# Altium PCB VisitCardPCB.PcbDoc (part 2 of 3)
Units mm, origin at the board's own origin, x right, y up, seen from the top; angles counter-clockwise.
Board outline 85 x 55 mm, 2 copper layers (Top, Bottom); 50 components, 47 nets, 148 pads, 42 vias.
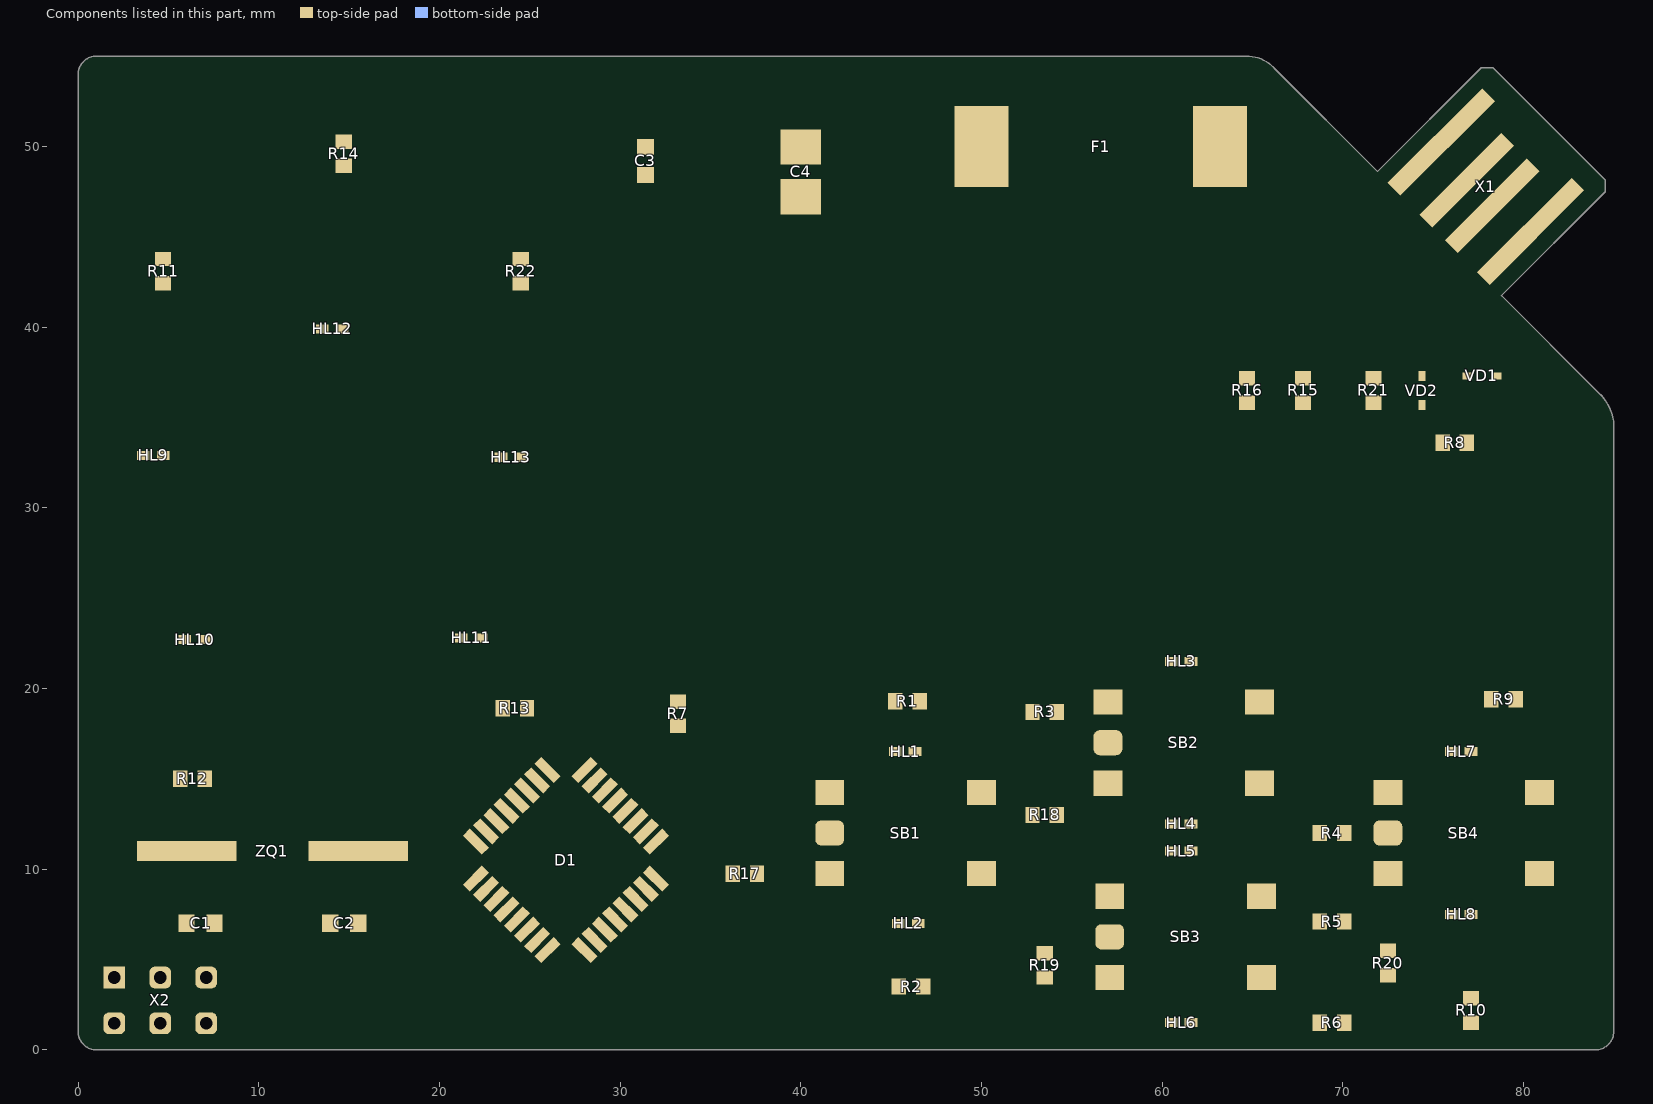
[diagram p2: the components of this part, seen from the top]

## Via types
v1: diameter 1, hole 0.5, Top to Bottom, 41 vias
v2: diameter 3.5/3.5 (per signal layer), hole 2.5, Top to Bottom, 1 vias

## Nets (pads, with @x,y where several pads share a name; then routed paths per layer and width w, separated by ;. In a path a pad name is that pad's centre, name@x,y a point inside that pad or via, vN(x,y) a via of type N, cw(c..) or ccw(c..) an arc to the next point about the centre after c; other vN are vias at no path point) (continued)
copper on no net: (continued)
  Top w0.025: 10.457,27.251 12.514,27.251 ; 10.457,27.276 12.489,27.276 ; 10.457,27.302 12.438,27.302 ; 10.457,27.327 12.413,27.327 ; 10.457,27.353 12.387,27.353 ; 10.457,27.378 12.337,27.378 ; 10.457,27.403 12.311,27.403 ; 10.457,27.429 12.337,27.429 ; 10.457,27.454 12.362,27.454 ; 10.457,27.48 12.413,27.48 ; 10.457,27.505 12.438,27.505 ; 10.457,27.53 12.464,27.53 ; 10.457,27.556 12.489,27.556 ; 10.482,27.175 12.591,27.175 ; 10.482,27.2 12.565,27.2 ; 10.482,27.226 12.54,27.226 ; 10.482,27.581 12.514,27.581 ; 10.482,27.607 12.54,27.607 ; 10.482,27.632 12.565,27.632 ; 10.508,27.124 12.616,27.124 ; 10.508,27.149 12.616,27.149 ; 10.508,27.657 12.591,27.657 ; 10.508,27.683 12.616,27.683 ; 10.533,27.099 12.641,27.099 ; 10.533,27.708 12.641,27.708 ; 10.559,27.073 12.667,27.073 ; 10.559,27.734 12.667,27.734 ; 10.559,27.759 12.667,27.759 ; 10.584,27.048 12.692,27.048 ; 10.609,27.022 12.692,27.022 ; 10.609,27.784 12.692,27.784 ; 10.635,27.81 12.718,27.81 ; 10.66,26.997 12.718,26.997 ; 10.686,27.835 12.718,27.835 ; 10.711,26.972 12.718,26.972 ; 10.762,27.861 12.743,27.861 ; 10.787,26.946 12.743,26.946 ; 10.838,27.886 12.743,27.886 ; 10.863,26.921 12.768,26.921 ; 10.965,27.911 12.768,27.911 ; 10.99,26.895 12.768,26.895 ; 11.092,27.937 12.768,27.937 ; 11.143,26.87 12.768,26.87 ; 11.194,27.962 12.794,27.962 ; 11.219,26.845 12.794,26.845 ; 11.244,27.988 12.794,27.988 ; 11.27,26.819 12.794,26.819 ; 11.295,26.794 12.819,26.794 ; 11.295,28.013 12.819,28.013 ; 11.321,26.743 12.819,26.743 ; 11.321,26.768 12.819,26.768 ; 11.321,28.038 12.819,28.038 ; 11.321,28.064 12.819,28.064 ; 11.346,26.692 12.845,26.692 ; 11.346,26.718 12.845,26.718 ; 11.346,28.089 12.845,28.089 ; 11.346,28.115 12.845,28.115 ; 11.371,26.616 12.87,26.616 ; 11.371,26.641 12.845,26.641 ; 11.371,26.667 12.845,26.667 ; 11.371,28.14 12.845,28.14 ; 11.371,28.165 12.845,28.165 ; 11.371,28.191 12.87,28.191 ; 11.397,26.438 12.895,26.438 ; 11.397,26.464 12.895,26.464 ; 11.397,26.489 12.87,26.489 ; 11.397,26.514 12.87,26.514 ; 11.397,26.54 12.87,26.54 ; 11.397,26.565 12.87,26.565 ; 11.397,26.591 12.87,26.591 ; 11.397,28.216 12.87,28.216 ; 11.397,28.242 12.87,28.242 ; 11.397,28.267 12.87,28.267 ; 11.397,28.292 12.87,28.292 ; 11.397,28.318 12.87,28.318 ; 11.397,28.343 12.895,28.343 ; 11.397,28.369 12.895,28.369 ; 11.422,26.006 12.921,26.006 ; 11.422,26.032 12.921,26.032 ; 11.422,26.057 12.921,26.057 ; 11.422,26.083 12.921,26.083 ; 11.422,26.108 12.921,26.108 ; 11.422,26.133 12.921,26.133 ; 11.422,26.159 12.921,26.159 ; 11.422,26.184 12.921,26.184 ; 11.422,26.21 12.921,26.21 ; 11.422,26.235 12.921,26.235 ; 11.422,26.26 12.921,26.26 ; 11.422,26.286 12.895,26.286 ; 11.422,26.311 12.895,26.311 ; 11.422,26.337 12.895,26.337 ; 11.422,26.362 12.895,26.362 ; 11.422,26.387 12.895,26.387 ; 11.422,26.413 12.895,26.413 ; 11.422,28.394 12.895,28.394 ; 11.422,28.419 12.895,28.419 ; 11.422,28.445 12.895,28.445 ; 11.422,28.47 12.895,28.47 ; 11.422,28.496 12.895,28.496 ; 11.422,28.521 12.895,28.521 ; 11.422,28.546 12.921,28.546 ; 11.422,28.572 12.921,28.572 ; 11.422,28.597 12.921,28.597 ; 11.422,28.623 12.921,28.623 ; 11.422,28.648 12.921,28.648 ; 11.422,28.673 12.921,28.673 ; 11.422,28.699 12.921,28.699 ; 11.422,28.724 12.921,28.724 ; 11.422,28.75 12.921,28.75 ; 11.422,28.775 12.921,28.775 ; 11.422,28.8 12.921,28.8 ; 11.422,28.826 12.921,28.826 ; 11.448,25.549 12.946,25.549 ; 11.448,25.575 12.946,25.575 ; 11.448,25.6 12.946,25.6 ; 11.448,25.625 12.946,25.625 ; 11.448,25.651 12.946,25.651 ; 11.448,25.676 12.946,25.676 ; 11.448,25.702 12.946,25.702 ; 11.448,25.727 12.946,25.727 ; 11.448,25.752 12.946,25.752 ; 11.448,25.778 12.946,25.778 ; 11.448,25.803 12.946,25.803 ; 11.448,25.829 12.946,25.829 ; 11.448,25.854 12.946,25.854 ; 11.448,25.879 12.946,25.879 ; 11.448,25.905 12.946,25.905 ; 11.448,25.93 12.946,25.93 ; 11.448,25.956 12.921,25.956 ; 11.448,25.981 12.921,25.981 ; 11.448,28.851 12.921,28.851 ; 11.448,28.877 12.946,28.877 ; 11.448,28.902 12.946,28.902 ; 11.448,28.927 12.946,28.927 ; 11.448,28.953 12.946,28.953 ; 11.448,28.978 12.946,28.978 ; 11.448,29.004 12.946,29.004 ; 11.448,29.029 12.946,29.029 ; 11.448,29.054 12.946,29.054 ; 11.448,29.08 12.946,29.08 ; 11.448,29.105 12.946,29.105 ; 11.448,29.131 12.946,29.131 ; 11.448,29.156 12.946,29.156 ; 11.448,29.181 12.946,29.181 ; 11.448,29.207 12.946,29.207 ; 11.448,29.232 12.946,29.232 ; 11.448,29.258 12.946,29.258 ; 11.473,25.194 12.972,25.194 ; 11.473,25.219 12.972,25.219 ; 11.473,25.244 12.972,25.244 ; 11.473,25.27 12.972,25.27 ; 11.473,25.295 12.972,25.295 ; 11.473,25.321 12.972,25.321 ; 11.473,25.346 12.972,25.346 ; 11.473,25.371 12.946,25.371 ; 11.473,25.397 12.946,25.397 ; 11.473,25.422 12.946,25.422 ; 11.473,25.448 12.946,25.448 ; 11.473,25.473 12.946,25.473 ; 11.473,25.498 12.946,25.498 ; 11.473,25.524 12.946,25.524 ; 11.473,29.283 12.946,29.283 ; 11.473,29.308 12.946,29.308 ; 11.473,29.334 12.946,29.334 ; 11.473,29.359 12.946,29.359 ; 11.473,29.385 12.946,29.385 ; 11.473,29.41 12.946,29.41 ; 11.473,29.435 12.946,29.435 ; 11.473,29.461 12.972,29.461 ; 11.473,29.486 12.972,29.486 ; 11.473,29.512 12.972,29.512 ; 11.473,29.537 12.972,29.537 ; 11.473,29.562 12.972,29.562 ; 11.473,29.588 12.972,29.588 ; 11.473,29.613 12.972,29.613 ; 11.498,24.889 13.048,24.889 ; 11.498,24.914 13.022,24.914 ; 11.498,24.94 12.997,24.94 ; 11.498,24.965 12.997,24.965 ; 11.498,24.99 12.997,24.99 ; 11.498,25.016 12.972,25.016 ; 11.498,25.041 12.972,25.041 ; 11.498,25.067 12.972,25.067 ; 11.498,25.092 12.972,25.092 ; 11.498,25.117 12.972,25.117 ; 11.498,25.143 12.972,25.143 ; 11.498,25.168 12.972,25.168 ; 11.498,29.639 12.972,29.639 ; 11.498,29.664 12.972,29.664 ; 11.498,29.689 12.972,29.689 ; 11.498,29.715 12.972,29.715 ; 11.498,29.74 12.972,29.74 ; 11.498,29.766 12.972,29.766 ; 11.498,29.791 12.972,29.791 ; 11.498,29.816 12.972,29.816 ; 11.498,29.842 12.997,29.842 ; 11.498,29.867 12.997,29.867 ; 11.498,29.893 13.022,29.893 ; 11.498,29.918 13.022,29.918 ; 11.524,24.736 13.632,24.736 ; 11.524,24.762 13.581,24.762 ; 11.524,24.787 13.175,24.787 ; 11.524,24.813 13.149,24.813 ; 11.524,24.838 13.099,24.838 ; 11.524,24.863 13.073,24.863 ; 11.524,29.943 13.048,29.943 ; 11.524,29.969 13.099,29.969 ; 11.524,29.994 13.124,29.994 ; 11.524,30.02 13.175,30.02 ; 11.524,30.045 13.226,30.045 ; 11.524,30.07 13.632,30.07 ; 11.549,24.66 13.708,24.66 ; 11.549,24.686 13.708,24.686 ; 11.549,24.711 13.683,24.711 ; 11.549,30.096 13.657,30.096 ; 11.549,30.121 13.683,30.121 ; 11.549,30.147 13.708,30.147 ; 11.549,30.172 13.734,30.172 ; 11.575,24.584 13.759,24.584 ; 11.575,24.609 13.759,24.609 ; 11.575,24.635 13.734,24.635 ; 11.575,30.197 13.759,30.197 ; 11.575,30.223 13.759,30.223 ; 11.575,30.248 13.759,30.248 ; 11.6,24.533 13.784,24.533 ; 11.6,24.559 13.784,24.559 ; 11.6,30.274 13.784,30.274 ; 11.6,30.299 13.784,30.299 ; 11.625,24.482 13.784,24.482 ; 11.625,24.508 13.784,24.508 ; 11.625,30.324 13.784,30.324 ; 11.625,30.35 13.784,30.35 ; 11.651,24.432 13.784,24.432 ; 11.651,24.457 13.784,24.457 ; 11.651,30.375 13.784,30.375 ; 11.676,24.381 13.784,24.381 ; 11.676,24.406 13.784,24.406 ; 11.676,30.401 13.784,30.401 ; 11.676,30.426 13.784,30.426 ; 11.702,24.355 13.784,24.355 ; 11.702,30.451 13.784,30.451 ; 11.702,30.477 13.784,30.477 ; 11.727,24.33 13.784,24.33 ; 11.727,30.502 13.784,30.502 ; 11.752,24.279 13.784,24.279 ; 11.752,24.305 13.784,24.305 ; 11.752,30.528 13.784,30.528 ; 11.778,24.254 13.759,24.254 ; 11.778,30.553 13.759,30.553 ; 11.803,24.228 13.759,24.228 ; 11.803,30.578 13.759,30.578 ; 11.829,24.203 13.734,24.203 ; 11.829,30.604 13.759,30.604 ; 11.854,24.178 13.734,24.178 ; 11.854,30.629 13.734,30.629 ; 11.879,24.152 13.708,24.152 ; 11.879,30.655 13.734,30.655 ; 11.905,30.68 13.708,30.68 ; 11.93,24.127 13.708,24.127 ; 11.956,24.101 13.683,24.101 ; 11.956,30.705 13.683,30.705 ; 11.981,24.076 13.657,24.076 ; 11.981,30.731 13.657,30.731 ; 12.006,30.756 13.657,30.756 ; 12.032,24.051 13.632,24.051 ; 12.057,24.025 13.607,24.025 ; 12.057,30.782 13.632,30.782 ; 12.083,30.807 13.581,30.807 ; 12.108,24 13.581,24 ; 12.133,23.974 13.556,23.974 ; 12.133,30.832 13.556,30.832 ; 12.159,30.858 13.53,30.858 ; 12.184,23.949 13.505,23.949 ; 12.21,30.883 13.48,30.883 ; 12.235,23.924 13.48,23.924 ; 12.26,23.898 13.429,23.898 ; 12.26,30.909 13.454,30.909 ; 12.311,30.934 13.378,30.934 ; 12.337,23.873 13.378,23.873 ; 12.362,30.959 13.327,30.959 ; 12.387,23.847 13.302,23.847 ; 12.438,30.985 13.251,30.985 ; 12.489,23.822 13.2,23.822 ; 12.565,31.01 13.124,31.01 ; 12.641,23.797 13.073,23.797 ; 13.276,30.045 13.581,30.045 ; 14.369,24.279 16.401,24.279 ; 14.369,24.305 16.401,24.305 ; 14.369,24.33 16.426,24.33 ; 14.369,24.355 16.451,24.355 ; 14.369,24.381 16.477,24.381 ; 14.369,24.406 16.477,24.406 ; 14.369,24.432 16.502,24.432 ; 14.369,24.457 16.528,24.457 ; 14.369,24.482 16.528,24.482 ; 14.369,24.508 16.553,24.508 ; 14.369,24.533 16.553,24.533 ; 14.369,24.559 16.553,24.559 ; 14.369,30.274 16.553,30.274 ; 14.369,30.299 16.553,30.299 ; 14.369,30.324 16.528,30.324 ; 14.369,30.35 16.528,30.35 ; 14.369,30.375 16.502,30.375 ; 14.369,30.401 16.502,30.401 ; 14.369,30.426 16.477,30.426 ; 14.369,30.451 16.451,30.451 ; 14.369,30.477 16.451,30.477 ; 14.369,30.502 16.426,30.502 ; 14.369,30.528 16.401,30.528 ; 14.394,24.228 16.35,24.228 ; 14.394,24.254 16.375,24.254 ; 14.394,24.584 16.578,24.584 ; 14.394,24.609 16.578,24.609 ; 14.394,30.197 16.578,30.197 ; 14.394,30.223 16.578,30.223 ; 14.394,30.248 16.578,30.248 ; 14.394,30.553 16.375,30.553 ; 14.394,30.578 16.35,30.578 ; 14.394,30.604 16.324,30.604 ; 14.419,24.178 16.299,24.178 ; 14.419,24.203 16.324,24.203 ; 14.419,24.635 16.578,24.635 ; 14.419,30.172 16.604,30.172 ; 14.419,30.629 16.299,30.629 ; 14.445,24.127 16.223,24.127 ; 14.445,24.152 16.274,24.152 ; 14.445,24.66 16.604,24.66 ; 14.445,24.686 16.604,24.686 ; 14.445,30.147 16.604,30.147 ; 14.445,30.655 16.274,30.655 ; 14.445,30.68 16.248,30.68 ; 14.47,24.101 16.197,24.101 ; 14.47,24.711 16.604,24.711 ; 14.47,30.121 16.604,30.121 ; 14.47,30.705 16.197,30.705 ; 14.496,24.076 16.172,24.076 ; 14.496,30.096 16.604,30.096 ; 14.496,30.731 16.172,30.731 ; 14.496,30.756 16.147,30.756 ; 14.521,24.051 16.121,24.051 ; 14.521,24.736 16.629,24.736 ; 14.521,30.07 16.629,30.07 ; 14.521,30.782 16.096,30.782 ; 14.546,24.025 16.096,24.025 ; 14.572,24 16.045,24 ; 14.572,24.762 16.629,24.762 ; 14.572,30.807 16.07,30.807 ; 14.597,23.974 16.02,23.974 ; 14.597,30.045 14.877,30.045 ; 14.597,30.832 16.02,30.832 ; 14.623,30.858 15.994,30.858 ; 14.648,23.949 15.969,23.949 ; 14.673,23.924 15.918,23.924 ; 14.673,30.883 15.943,30.883 ; 14.699,30.909 15.893,30.909 ; 14.724,23.898 15.893,23.898 ; 14.775,23.873 15.816,23.873 ; 14.775,30.934 15.842,30.934 ; 14.826,30.959 15.791,30.959 ; 14.851,23.847 15.766,23.847 ; 14.902,30.985 15.715,30.985 ; 14.927,30.045 16.629,30.045 ; 14.953,23.822 15.664,23.822 ; 14.978,24.787 16.629,24.787 ; 14.978,30.02 16.629,30.02 ; 15.004,24.813 16.629,24.813 ; 15.029,29.994 16.629,29.994 ; 15.029,31.01 15.588,31.01 ; 15.054,24.838 16.629,24.838 ; 15.054,29.969 16.629,29.969 ; 15.08,23.797 15.512,23.797 ; 15.08,24.863 16.629,24.863 ; 15.105,24.889 16.655,24.889 ; 15.105,29.943 16.629,29.943 ; 15.131,24.914 16.655,24.914 ; 15.131,29.893 16.655,29.893 ; 15.131,29.918 16.655,29.918 ; 15.156,24.94 16.655,24.94 ; 15.156,24.965 16.655,24.965 ; 15.156,29.842 16.655,29.842 ; 15.156,29.867 16.655,29.867 ; 15.181,24.99 16.655,24.99 ; 15.181,25.016 16.655,25.016 ; 15.181,25.041 16.655,25.041 ; 15.181,25.067 16.655,25.067 ; 15.181,25.092 16.655,25.092 ; 15.181,25.117 16.655,25.117 ; 15.181,25.143 16.655,25.143 ; 15.181,25.168 16.655,25.168 ; 15.181,25.194 16.68,25.194 ; 15.181,25.219 16.68,25.219 ; 15.181,25.244 16.68,25.244 ; 15.181,25.27 16.68,25.27 ; 15.181,25.295 16.68,25.295 ; 15.181,25.321 16.68,25.321 ; 15.181,29.486 16.68,29.486 ; 15.181,29.512 16.68,29.512 ; 15.181,29.537 16.68,29.537 ; 15.181,29.562 16.68,29.562 ; 15.181,29.588 16.68,29.588 ; 15.181,29.613 16.68,29.613 ; 15.181,29.639 16.68,29.639 ; 15.181,29.664 16.655,29.664 ; 15.181,29.689 16.655,29.689 ; 15.181,29.715 16.655,29.715 ; 15.181,29.74 16.655,29.74 ; 15.181,29.766 16.655,29.766 ; 15.181,29.791 16.655,29.791 ; 15.181,29.816 16.655,29.816 ; 15.207,25.346 16.68,25.346 ; 15.207,25.371 16.68,25.371 ; 15.207,25.397 16.68,25.397 ; 15.207,25.422 16.68,25.422 ; 15.207,25.448 16.68,25.448 ; 15.207,25.473 16.68,25.473 ; 15.207,25.498 16.68,25.498 ; 15.207,25.524 16.68,25.524 ; 15.207,25.549 16.705,25.549 ; 15.207,25.575 16.705,25.575 ; 15.207,25.6 16.705,25.6 ; 15.207,25.625 16.705,25.625 ; 15.207,25.651 16.705,25.651 ; 15.207,25.676 16.705,25.676 ; 15.207,25.702 16.705,25.702 ; 15.207,25.727 16.705,25.727 ; 15.207,25.752 16.705,25.752 ; 15.207,25.778 16.705,25.778 ; 15.207,25.803 16.705,25.803 ; 15.207,25.829 16.705,25.829 ; 15.207,25.854 16.705,25.854 ; 15.207,25.879 16.705,25.879 ; 15.207,25.905 16.705,25.905 ; 15.207,28.902 16.705,28.902 ; 15.207,28.927 16.705,28.927 ; 15.207,28.953 16.705,28.953 ; 15.207,28.978 16.705,28.978 ; 15.207,29.004 16.705,29.004 ; 15.207,29.029 16.705,29.029 ; 15.207,29.054 16.705,29.054 ; 15.207,29.08 16.705,29.08 ; 15.207,29.105 16.705,29.105 ; 15.207,29.131 16.705,29.131 ; 15.207,29.156 16.705,29.156 ; 15.207,29.181 16.705,29.181 ; 15.207,29.207 16.705,29.207 ; 15.207,29.232 16.705,29.232 ; 15.207,29.258 16.705,29.258 ; 15.207,29.283 16.705,29.283 ; 15.207,29.308 16.68,29.308 ; 15.207,29.334 16.68,29.334 ; 15.207,29.359 16.68,29.359 ; 15.207,29.385 16.68,29.385 ; 15.207,29.41 16.68,29.41 ; 15.207,29.435 16.68,29.435 ; 15.207,29.461 16.68,29.461 ; 15.232,25.93 16.705,25.93 ; 15.232,25.956 16.705,25.956 ; 15.232,25.981 16.731,25.981 ; 15.232,26.006 16.731,26.006 ; 15.232,26.032 16.731,26.032 ; 15.232,26.057 16.731,26.057 ; 15.232,26.083 16.731,26.083 ; 15.232,26.108 16.731,26.108 ; 15.232,26.133 16.731,26.133 ; 15.232,26.159 16.731,26.159 ; 15.232,26.184 16.731,26.184 ; 15.232,26.21 16.731,26.21 ; 15.232,26.235 16.731,26.235 ; 15.232,26.26 16.731,26.26 ; 15.232,28.546 16.731,28.546 ; 15.232,28.572 16.731,28.572 ; 15.232,28.597 16.731,28.597 ; 15.232,28.623 16.731,28.623 ; 15.232,28.648 16.731,28.648 ; 15.232,28.673 16.731,28.673 ; 15.232,28.699 16.731,28.699 ; 15.232,28.724 16.731,28.724 ; 15.232,28.75 16.731,28.75 ; 15.232,28.775 16.731,28.775 ; 15.232,28.8 16.731,28.8 ; 15.232,28.826 16.731,28.826 ; 15.232,28.851 16.705,28.851 ; 15.232,28.877 16.705,28.877 ; 15.258,26.286 16.731,26.286 ; 15.258,26.311 16.731,26.311 ; 15.258,26.337 16.731,26.337 ; 15.258,26.362 16.731,26.362 ; 15.258,26.387 16.731,26.387 ; 15.258,26.413 16.756,26.413 ; 15.258,26.438 16.756,26.438 ; 15.258,26.464 16.756,26.464 ; 15.258,28.343 16.756,28.343 ; 15.258,28.369 16.756,28.369 ; 15.258,28.394 16.756,28.394 ; 15.258,28.419 16.731,28.419 ; 15.258,28.445 16.731,28.445 ; 15.258,28.47 16.731,28.47 ; 15.258,28.496 16.731,28.496 ; 15.258,28.521 16.731,28.521 ; 15.283,26.489 16.756,26.489 ; 15.283,26.514 16.756,26.514 ; 15.283,26.54 16.756,26.54 ; 15.283,26.565 16.756,26.565 ; 15.283,26.591 16.756,26.591 ; 15.283,26.616 16.782,26.616 ; 15.283,28.191 16.782,28.191 ; 15.283,28.216 16.782,28.216 ; 15.283,28.242 16.756,28.242 ; 15.283,28.267 16.756,28.267 ; 15.283,28.292 16.756,28.292 ; 15.283,28.318 16.756,28.318 ; 15.308,26.641 16.782,26.641 ; 15.308,26.667 16.782,26.667 ; 15.308,26.692 16.807,26.692 ; 15.308,26.718 16.807,26.718 ; 15.308,28.089 16.807,28.089 ; 15.308,28.115 16.807,28.115 ; 15.308,28.14 16.782,28.14 ; 15.308,28.165 16.782,28.165 ; 15.334,26.743 16.832,26.743 ; 15.334,26.768 16.832,26.768 ; 15.334,26.794 16.858,26.794 ; 15.334,28.013 16.858,28.013 ; 15.334,28.038 16.832,28.038 ; 15.334,28.064 16.832,28.064 ; 15.359,26.819 16.883,26.819 ; 15.359,26.845 16.934,26.845 ; 15.359,27.962 16.959,27.962 ; 15.359,27.988 16.909,27.988 ; 15.385,26.87 17.01,26.87 ; 15.385,26.895 17.163,26.895 ; 15.385,27.911 17.188,27.911 ; 15.385,27.937 17.061,27.937 ; 15.41,26.921 17.29,26.921 ; 15.41,26.946 17.366,26.946 ; 15.41,27.861 17.391,27.861 ; 15.41,27.886 17.315,27.886 ; 15.435,26.972 17.442,26.972 ; 15.435,26.997 17.493,26.997 ; 15.435,27.81 17.518,27.81 ; 15.435,27.835 17.467,27.835 ; 15.461,27.022 17.544,27.022 ; 15.461,27.048 17.569,27.048 ; 15.461,27.784 17.544,27.784 ; 15.486,27.073 17.594,27.073 ; 15.486,27.734 17.62,27.734 ; 15.486,27.759 17.594,27.759 ; 15.512,27.099 17.62,27.099 ; 15.512,27.708 17.62,27.708 ; 15.537,27.124 17.645,27.124 ; 15.537,27.149 17.645,27.149 ; 15.537,27.683 17.645,27.683 ; 15.562,27.175 17.671,27.175 ; 15.562,27.657 17.671,27.657 ; 15.588,27.2 17.671,27.2 ; 15.588,27.632 17.671,27.632 ; 15.613,27.226 17.671,27.226 ; 15.613,27.607 17.671,27.607 ; 15.639,27.251 17.696,27.251 ; 15.639,27.581 17.696,27.581 ; 15.664,27.276 17.696,27.276 ; 15.664,27.556 17.696,27.556 ; 15.689,27.53 17.696,27.53 ; 15.715,27.302 17.696,27.302 ; 15.715,27.505 17.696,27.505 ; 15.74,27.327 17.696,27.327 ; 15.74,27.48 17.696,27.48 ; 15.766,27.353 17.696,27.353 ; 15.791,27.454 17.696,27.454 ; 15.816,27.378 17.696,27.378 ; 15.816,27.429 17.696,27.429 ; 15.842,27.403 17.696,27.403 ; 57.329,28.274 63.883,28.274 ; 57.329,28.299 63.832,28.299 ; 57.329,28.325 63.781,28.325 ; 57.329,28.35 63.73,28.35 ; 57.329,28.376 63.679,28.376 ; 57.329,28.401 63.629,28.401 ; 57.329,28.426 63.552,28.426 ; 57.329,28.452 63.476,28.452 ; 57.329,28.477 63.4,28.477 ; 57.329,28.503 63.273,28.503 ; 57.329,28.528 59.158,28.528 ; 57.329,28.553 59.158,28.553 ; 57.329,28.579 59.158,28.579 ; 57.329,28.604 59.158,28.604 ; 57.329,28.63 59.158,28.63 ; 57.329,28.655 59.158,28.655 ; 57.329,28.68 59.158,28.68 ; 57.329,28.706 59.158,28.706 ; 57.329,28.731 59.158,28.731 ; 57.329,28.757 59.158,28.757 ; 57.329,28.782 59.158,28.782 ; 57.329,28.807 59.158,28.807 ; 57.329,28.833 59.158,28.833 ; 57.329,28.858 59.158,28.858 ; 57.329,28.884 59.158,28.884 ; 57.329,28.909 59.158,28.909 ; 57.329,28.934 59.158,28.934 ; 57.329,28.96 59.158,28.96 ; 57.329,28.985 59.158,28.985 ; 57.329,29.011 59.158,29.011 ; 57.329,29.036 59.158,29.036 ; 57.329,29.061 59.158,29.061 ; 57.329,29.087 59.158,29.087 ; 57.329,29.112 59.158,29.112 ; 57.329,29.138 59.158,29.138 ; 57.329,29.163 59.158,29.163 ; 57.329,29.188 59.158,29.188 ; 57.329,29.214 59.158,29.214 ; 57.329,29.239 59.158,29.239 ; 57.329,29.265 59.158,29.265 ; 57.329,29.29 59.158,29.29 ; 57.329,29.315 59.158,29.315 ; 57.329,29.341 59.158,29.341 ; 57.329,29.366 59.158,29.366 ; 57.329,29.392 59.158,29.392 ; 57.329,29.417 59.158,29.417 ; 57.329,29.442 59.158,29.442 ; 57.329,29.468 59.158,29.468 ; 57.329,29.493 59.158,29.493 ; 57.329,29.519 59.158,29.519 ; 57.329,29.544 59.158,29.544 ; 57.329,29.569 59.158,29.569 ; 57.329,29.595 59.158,29.595 ; 57.329,29.62 59.158,29.62 ; 57.329,29.646 59.158,29.646 ; 57.329,29.671 59.158,29.671 ; 57.329,29.696 59.158,29.696 ; 57.329,29.722 59.158,29.722 ; 57.329,29.747 59.158,29.747 ; 57.329,29.773 59.158,29.773 ; 57.329,29.798 59.158,29.798 ; 57.329,29.823 59.158,29.823 ; 57.329,29.849 59.158,29.849 ; 57.329,29.874 59.158,29.874 ; 57.329,29.9 59.158,29.9 ; 57.329,29.925 59.158,29.925 ; 57.329,29.95 59.158,29.95 ; 57.329,29.976 59.158,29.976 ; 57.329,30.001 59.158,30.001 ; 57.329,30.027 59.158,30.027 ; 57.329,30.052 59.158,30.052 ; 57.329,30.077 59.158,30.077 ; 57.329,30.103 59.158,30.103 ; 57.329,30.128 59.158,30.128 ; 57.329,30.154 59.158,30.154 ; 57.329,30.179 59.158,30.179 ; 57.329,30.204 59.158,30.204 ; 57.329,30.23 59.158,30.23 ; 57.329,30.255 64.035,30.255 ; 57.329,30.281 64.086,30.281 ; 57.329,30.306 64.137,30.306 ; 57.329,30.331 64.162,30.331 ; 57.329,30.357 64.187,30.357 ; 57.329,30.382 64.213,30.382 ; 57.329,30.408 64.238,30.408 ; 57.329,30.433 64.238,30.433 ; 57.329,30.458 64.264,30.458 ; 57.329,30.484 64.264,30.484 ; 57.355,28.045 64.162,28.045 ; 57.355,28.071 64.137,28.071 ; 57.355,28.096 64.111,28.096 ; 57.355,28.122 64.086,28.122 ; 57.355,28.147 64.06,28.147 ; 57.355,28.172 64.01,28.172 ; 57.355,28.198 63.984,28.198 ; 57.355,28.223 63.959,28.223 ; 57.355,28.249 63.908,28.249 ; 57.355,30.509 64.264,30.509 ; 57.355,30.535 64.289,30.535 ; 57.355,30.56 64.289,30.56 ; 57.355,30.585 64.289,30.585 ; 57.355,30.611 64.289,30.611 ; 57.355,30.636 64.289,30.636 ; 57.355,30.662 64.289,30.662 ; 57.355,30.687 64.289,30.687 ; 57.355,30.712 64.289,30.712 ; 57.38,27.944 64.264,27.944 ; 57.38,27.969 64.238,27.969 ; 57.38,27.995 64.213,27.995 ; 57.38,28.02 64.187,28.02 ; 57.38,30.738 64.289,30.738 ; 57.38,30.763 64.289,30.763 ; 57.38,30.789 64.289,30.789 ; 57.38,30.814 64.289,30.814 ; 57.406,27.868 64.314,27.868 ; 57.406,27.893 64.289,27.893 ; 57.406,27.918 64.289,27.918 ; 57.406,30.839 64.289,30.839 ; 57.406,30.865 64.289,30.865 ; 57.406,30.89 64.289,30.89 ; 57.431,27.791 64.365,27.791 ; 57.431,27.817 64.365,27.817 ; 57.431,27.842 64.34,27.842 ; 57.431,30.916 64.289,30.916 ; 57.431,30.941 64.289,30.941 ; 57.431,30.966 64.289,30.966 ; 57.456,27.715 64.416,27.715 ; 57.456,27.741 64.416,27.741 ; 57.456,27.766 64.391,27.766 ; 57.456,30.992 64.289,30.992 ; 57.456,31.017 64.289,31.017 ; 57.456,31.043 64.289,31.043 ; 57.482,27.664 64.441,27.664 ; 57.482,27.69 64.441,27.69 ; 57.482,31.068 64.289,31.068 ; 57.482,31.093 64.289,31.093 ; 57.507,27.614 64.467,27.614 ; 57.507,27.639 64.467,27.639 ; 57.507,31.119 64.289,31.119 ; 57.507,31.144 64.289,31.144 ; 57.533,27.563 64.492,27.563 ; 57.533,27.588 64.492,27.588 ; 57.533,31.17 64.289,31.17 ; 57.533,31.195 64.289,31.195 ; 57.558,27.512 64.518,27.512 ; 57.558,27.537 64.518,27.537 ; 57.558,31.22 64.289,31.22 ; 57.558,31.246 64.289,31.246 ; 57.583,27.487 64.543,27.487 ; 57.583,31.271 64.289,31.271 ; 57.609,27.436 64.543,27.436 ; 57.609,27.461 64.543,27.461 ; 57.609,31.297 64.289,31.297 ; 57.609,31.322 64.289,31.322 ; 57.634,27.41 64.568,27.41 ; 57.634,31.347 64.289,31.347 ; 57.66,27.36 64.568,27.36 ; 57.66,27.385 64.568,27.385 ; 57.66,31.373 64.289,31.373 ; 57.66,31.398 64.289,31.398 ; 57.685,27.334 64.594,27.334 ; 57.685,31.424 64.289,31.424 ; 57.71,27.309 64.594,27.309 ; 57.71,31.449 64.289,31.449 ; 57.736,27.283 64.594,27.283 ; 57.736,31.474 64.289,31.474 ; 57.761,27.258 64.619,27.258 ; 57.761,31.5 64.289,31.5 ; 57.787,27.207 64.619,27.207 ; 57.787,27.233 64.619,27.233 ; 57.787,31.525 64.289,31.525 ; 57.787,31.551 64.289,31.551 ; 57.812,27.182 64.619,27.182 ; 57.812,31.576 64.289,31.576 ; 57.837,27.156 64.619,27.156 ; 57.837,31.601 64.289,31.601 ; 57.863,23.296 63.908,23.296 ; 57.863,23.321 63.959,23.321 ; 57.863,23.346 63.984,23.346 ; 57.863,23.372 64.01,23.372 ; 57.863,23.397 64.06,23.397 ; 57.863,23.423 64.086,23.423 ; 57.863,23.448 64.111,23.448 ; 57.863,23.473 64.137,23.473 ; 57.863,23.499 64.162,23.499 ; 57.863,23.524 64.187,23.524 ; 57.863,23.55 64.213,23.55 ; 57.863,23.575 64.238,23.575 ; 57.863,23.6 64.264,23.6 ; 57.863,23.626 64.289,23.626 ; 57.863,23.651 64.289,23.651 ; 57.863,23.677 64.314,23.677 ; 57.863,23.702 64.34,23.702 ; 57.863,23.727 64.365,23.727 ; 57.863,23.753 64.365,23.753 ; 57.863,23.778 64.391,23.778 ; 57.863,23.804 64.416,23.804 ; 57.863,23.829 64.416,23.829 ; 57.863,23.854 64.441,23.854 ; 57.863,23.88 64.441,23.88 ; 57.863,23.905 64.467,23.905 ; 57.863,23.931 64.467,23.931 ; 57.863,23.956 64.492,23.956 ; 57.863,23.981 64.492,23.981 ; 57.863,24.007 64.518,24.007 ; 57.863,24.032 64.518,24.032 ; 57.863,24.058 64.543,24.058 ; 57.863,24.083 64.543,24.083 ; 57.863,24.108 64.543,24.108 ; 57.863,24.134 64.568,24.134 ; 57.863,24.159 64.568,24.159 ; 57.863,24.185 64.568,24.185 ; 57.863,24.21 64.594,24.21 ; 57.863,24.235 64.594,24.235 ; 57.863,24.261 64.594,24.261 ; 57.863,24.286 64.619,24.286 ; 57.863,24.312 64.619,24.312 ; 57.863,24.337 64.619,24.337 ; 57.863,24.362 64.619,24.362 ; 57.863,24.388 64.619,24.388 ; 57.863,24.413 64.645,24.413 ; 57.863,24.439 64.645,24.439 ; 57.863,24.464 64.645,24.464 ; 57.863,24.489 64.645,24.489 ; 57.863,24.515 64.645,24.515 ; 57.863,24.54 64.645,24.54 ; 57.863,24.566 64.645,24.566 ; 57.863,24.591 64.645,24.591 ; 57.888,23.219 63.781,23.219 ; 57.888,23.245 63.832,23.245 ; 57.888,23.27 63.883,23.27 ; 57.888,24.616 64.645,24.616 ; 57.888,24.642 64.645,24.642 ; 57.888,27.131 64.645,27.131 ; 57.888,31.627 64.289,31.627 ; 57.914,23.194 63.73,23.194 ; 57.914,24.667 64.645,24.667 ; 57.914,24.693 64.645,24.693 ; 57.914,27.106 64.645,27.106 ; 57.914,31.652 64.289,31.652 ; 57.939,23.143 63.629,23.143 ; 57.939,23.169 63.679,23.169 ; 57.939,24.718 64.645,24.718 ; 57.939,27.08 64.645,27.08 ; 57.939,31.678 64.289,31.678 ; 57.964,23.118 63.552,23.118 ; 57.964,24.743 64.645,24.743 ; 57.964,27.055 64.645,27.055 ; 57.964,31.703 64.289,31.703 ; 57.99,24.769 64.645,24.769 ; 57.99,27.029 64.645,27.029 ; 57.99,31.728 64.289,31.728 ; 58.015,23.092 63.476,23.092 ; 58.041,23.067 63.4,23.067 ; 58.041,24.794 64.645,24.794 ; 58.041,27.004 64.645,27.004 ; 58.041,31.754 64.289,31.754 ; 58.066,26.979 64.645,26.979 ; 58.066,31.779 64.289,31.779 ; 58.091,23.042 63.273,23.042 ; 58.091,24.82 64.645,24.82 ; 58.117,26.953 64.645,26.953 ; 58.117,31.805 64.264,31.805 ; 58.142,26.928 64.645,26.928 ; 58.142,31.83 64.264,31.83 ; 58.193,24.845 64.645,24.845 ; 58.193,26.902 64.645,26.902 ; 58.193,31.855 64.264,31.855 ; 58.244,26.877 64.645,26.877 ; 58.244,31.881 64.238,31.881 ; 58.295,26.852 64.645,26.852 ; 58.295,31.906 64.213,31.906 ; 58.345,26.826 64.645,26.826 ; 58.345,31.932 64.213,31.932 ; 58.422,26.801 64.645,26.801 ; 58.422,31.957 64.187,31.957 ; 58.472,26.775 64.645,26.775 ; 58.472,31.982 64.162,31.982 ; 58.574,26.75 64.645,26.75 ; 58.574,32.008 64.111,32.008 ; 58.676,26.725 64.645,26.725 ; 58.676,32.033 64.06,32.033 ; 58.879,26.699 64.645,26.699 ; 58.879,32.059 63.959,32.059 ; 62.816,24.87 64.645,24.87 ; 62.816,24.896 64.645,24.896 ; 62.816,24.921 64.645,24.921 ; 62.816,24.947 64.645,24.947 ; 62.816,24.972 64.645,24.972 ; 62.816,24.997 64.645,24.997 ; 62.816,25.023 64.645,25.023 ; 62.816,25.048 64.645,25.048 ; 62.816,25.074 64.645,25.074 ; 62.816,25.099 64.645,25.099 ; 62.816,25.124 64.645,25.124 ; 62.816,25.15 64.645,25.15 ; 62.816,25.175 64.645,25.175 ; 62.816,25.201 64.645,25.201 ; 62.816,25.226 64.645,25.226 ; 62.816,25.251 64.645,25.251 ; 62.816,25.277 64.645,25.277 ; 62.816,25.302 64.645,25.302 ; 62.816,25.328 64.645,25.328 ; 62.816,25.353 64.645,25.353 ; 62.816,25.378 64.645,25.378 ; 62.816,25.404 64.645,25.404 ; 62.816,25.429 64.645,25.429 ; 62.816,25.455 64.645,25.455 ; 62.816,25.48 64.645,25.48 ; 62.816,25.505 64.645,25.505 ; 62.816,25.531 64.645,25.531 ; 62.816,25.556 64.645,25.556 ; 62.816,25.582 64.645,25.582 ; 62.816,25.607 64.645,25.607 ; 62.816,25.632 64.645,25.632 ; 62.816,25.658 64.645,25.658 ; 62.816,25.683 64.645,25.683 ; 62.816,25.709 64.645,25.709 ; 62.816,25.734 64.645,25.734 ; 62.816,25.759 64.645,25.759 ; 62.816,25.785 64.645,25.785 ; 62.816,25.81 64.645,25.81 ; 62.816,25.836 64.645,25.836 ; 62.816,25.861 64.645,25.861 ; 62.816,25.886 64.645,25.886 ; 62.816,25.912 64.645,25.912 ; 62.816,25.937 64.645,25.937 ; 62.816,25.963 64.645,25.963 ; 62.816,25.988 64.645,25.988 ; 62.816,26.013 64.645,26.013 ; 62.816,26.039 64.645,26.039 ; 62.816,26.064 64.645,26.064 ; 62.816,26.09 64.645,26.09 ; 62.816,26.115 64.645,26.115 ; 62.816,26.14 64.645,26.14 ; 62.816,26.166 64.645,26.166 ; 62.816,26.191 64.645,26.191 ; 62.816,26.217 64.645,26.217 ; 62.816,26.242 64.645,26.242 ; 62.816,26.267 64.645,26.267 ; 62.816,26.293 64.645,26.293 ; 62.816,26.318 64.645,26.318 ; 62.816,26.344 64.645,26.344 ; 62.816,26.369 64.645,26.369 ; 62.816,26.394 64.645,26.394 ; 62.816,26.42 64.645,26.42 ; 62.816,26.445 64.645,26.445 ; 62.816,26.471 64.645,26.471 ; 62.816,26.496 64.645,26.496 ; 62.816,26.521 64.645,26.521 ; 62.816,26.547 64.645,26.547 ; 62.816,26.572 64.645,26.572 ; 62.816,26.598 64.645,26.598 ; 62.816,26.623 64.645,26.623 ; 62.816,26.648 64.645,26.648 ; 62.816,26.674 64.645,26.674 ; 66.143,24.439 72.849,24.439 ; 66.143,24.464 72.849,24.464 ; 66.143,24.489 72.849,24.489 ; 66.143,24.515 72.849,24.515 ; 66.143,24.54 72.849,24.54 ; 66.143,24.566 72.849,24.566 ; 66.143,24.591 72.849,24.591 ; 66.143,24.616 72.849,24.616 ; 66.143,24.642 72.849,24.642 ; 66.143,24.667 72.849,24.667 ; 66.143,24.693 72.849,24.693 ; 66.143,24.718 72.849,24.718 ; 66.143,24.743 72.849,24.743 ; 66.143,24.769 72.849,24.769 ; 66.143,24.794 72.849,24.794 ; 66.143,24.82 72.849,24.82 ; 66.143,24.845 72.849,24.845 ; 66.143,24.87 67.972,24.87 ; 66.143,24.896 67.972,24.896 ; 66.143,24.921 67.972,24.921 ; 66.143,24.947 67.972,24.947 ; 66.143,24.972 67.972,24.972 ; 66.143,24.997 67.972,24.997 ; 66.143,25.023 67.972,25.023 ; 66.143,25.048 67.972,25.048 ; 66.143,25.074 67.972,25.074 ; 66.143,25.099 67.972,25.099 ; 66.143,25.124 67.972,25.124 ; 66.143,25.15 67.972,25.15 ; 66.143,25.175 67.972,25.175 ; 66.143,25.201 67.972,25.201 ; 66.143,25.226 67.972,25.226 ; 66.143,25.251 67.972,25.251 ; 66.143,25.277 67.972,25.277 ; 66.143,25.302 67.972,25.302 ; 66.143,25.328 67.972,25.328 ; 66.143,25.353 67.972,25.353 ; 66.143,25.378 67.972,25.378 ; 66.143,25.404 67.972,25.404 ; 66.143,25.429 67.972,25.429 ; 66.143,25.455 67.972,25.455 ; 66.143,25.48 67.972,25.48 ; 66.143,25.505 67.972,25.505 ; 66.143,25.531 67.972,25.531 ; 66.143,25.556 67.972,25.556 ; 66.143,25.582 67.972,25.582 ; 66.143,25.607 67.972,25.607 ; 66.143,25.632 67.972,25.632 ; 66.143,25.658 67.972,25.658 ; 66.143,25.683 67.972,25.683 ; 66.143,25.709 67.972,25.709 ; 66.143,25.734 67.972,25.734 ; 66.143,25.759 67.972,25.759 ; 66.143,25.785 67.972,25.785 ; 66.143,25.81 67.972,25.81 ; 66.143,25.836 67.972,25.836 ; 66.143,25.861 67.972,25.861 ; 66.143,25.886 67.972,25.886 ; 66.143,25.912 67.972,25.912 ; 66.143,25.937 67.972,25.937 ; 66.143,25.963 67.972,25.963 ; 66.143,25.988 67.972,25.988 ; 66.143,26.013 67.972,26.013 ; 66.143,26.039 67.972,26.039 ; 66.143,26.064 67.972,26.064 ; 66.143,26.09 67.972,26.09 ; 66.143,26.115 67.972,26.115 ; 66.143,26.14 67.972,26.14 ; 66.143,26.166 67.972,26.166 ; 66.143,26.191 67.972,26.191 ; 66.143,26.217 67.972,26.217 ; 66.143,26.242 67.972,26.242 ; 66.143,26.267 67.972,26.267 ; 66.143,26.293 67.972,26.293 ; 66.143,26.318 67.972,26.318 ; 66.143,26.344 67.972,26.344 ; 66.143,26.369 67.972,26.369 ; 66.143,26.394 67.972,26.394 ; 66.143,26.42 67.972,26.42 ; 66.143,26.445 67.972,26.445 ; 66.143,26.471 67.972,26.471 ; 66.143,26.496 67.972,26.496 ; 66.143,26.521 67.972,26.521 ; 66.143,26.547 67.972,26.547 ; 66.143,26.572 67.972,26.572 ; 66.143,26.598 67.972,26.598 ; 66.143,26.623 67.972,26.623 ; 66.143,26.648 67.972,26.648 ; 66.143,26.674 67.972,26.674 ; 66.143,26.699 67.972,26.699 ; 66.143,26.725 67.972,26.725 ; 66.143,26.75 67.972,26.75 ; 66.143,26.775 67.972,26.775 ; 66.143,26.801 67.972,26.801 ; 66.143,26.826 67.972,26.826 ; 66.143,26.852 67.972,26.852 ; 66.143,26.877 67.972,26.877 ; 66.143,26.902 67.972,26.902 ; 66.143,26.928 67.972,26.928 ; 66.143,26.953 67.972,26.953 ; 66.143,26.979 67.972,26.979 ; 66.143,27.004 67.972,27.004 ; 66.143,27.029 67.972,27.029 ; 66.143,27.055 67.972,27.055 ; 66.143,27.08 67.972,27.08 ; 66.143,27.106 67.972,27.106 ; 66.143,27.131 67.972,27.131 ; 66.143,27.156 67.972,27.156 ; 66.143,27.182 67.972,27.182 ; 66.143,27.207 67.972,27.207 ; 66.143,27.233 67.972,27.233 ; 66.143,27.258 67.972,27.258 ; 66.143,27.283 67.972,27.283 ; 66.143,27.309 67.972,27.309 ; 66.143,27.334 67.972,27.334 ; 66.143,27.36 67.972,27.36 ; 66.143,27.385 67.972,27.385 ; 66.143,27.41 67.972,27.41 ; 66.143,27.436 67.972,27.436 ; 66.143,27.461 67.972,27.461 ; 66.143,27.487 67.972,27.487 ; 66.143,27.512 67.972,27.512 ; 66.143,27.537 67.972,27.537 ; 66.143,27.563 67.972,27.563 ; 66.143,27.588 67.972,27.588 ; 66.143,27.614 67.972,27.614 ; 66.143,27.639 67.972,27.639 ; 66.143,27.664 67.972,27.664 ; 66.143,27.69 67.972,27.69 ; 66.143,27.715 67.972,27.715 ; 66.143,27.741 67.972,27.741 ; 66.143,27.766 67.972,27.766 ; 66.143,27.791 67.972,27.791 ; 66.143,27.817 67.972,27.817 ; 66.143,27.842 67.972,27.842 ; 66.143,27.868 67.972,27.868 ; 66.143,27.893 72.849,27.893 ; 66.143,27.918 72.849,27.918 ; 66.143,27.944 72.849,27.944 ; 66.143,27.969 72.849,27.969 ; 66.143,27.995 72.849,27.995 ; 66.143,28.02 72.849,28.02 ; 66.143,28.045 72.849,28.045 ; 66.143,28.071 72.849,28.071 ; 66.143,28.096 72.849,28.096 ; 66.143,28.122 72.849,28.122 ; 66.143,28.147 72.849,28.147 ; 66.143,28.172 72.849,28.172 ; 66.143,28.198 72.849,28.198 ; 66.143,28.223 72.849,28.223 ; 66.143,28.249 72.849,28.249 ; 66.143,28.274 72.849,28.274 ; 66.143,28.299 72.849,28.299 ; 66.169,24.312 72.823,24.312 ; 66.169,24.337 72.823,24.337 ; 66.169,24.362 72.823,24.362 ; 66.169,24.388 72.823,24.388 ; 66.169,24.413 72.849,24.413 ; 66.169,28.325 72.823,28.325 ; 66.169,28.35 72.823,28.35 ; 66.169,28.376 72.823,28.376 ; 66.169,28.401 72.823,28.401 ; 66.169,28.426 72.823,28.426 ; 66.194,24.21 72.798,24.21 ; 66.194,24.235 72.798,24.235 ; 66.194,24.261 72.798,24.261 ; 66.194,24.286 72.823,24.286 ; 66.194,28.452 72.798,28.452 ; 66.194,28.477 72.798,28.477 ; 66.194,28.503 72.798,28.503 ; 66.194,28.528 72.798,28.528 ; 66.219,24.134 72.773,24.134 ; 66.219,24.159 72.773,24.159 ; 66.219,24.185 72.773,24.185 ; 66.219,28.553 72.773,28.553 ; 66.219,28.579 72.773,28.579 ; 66.219,28.604 72.773,28.604 ; 66.245,24.058 72.747,24.058 ; 66.245,24.083 72.747,24.083 ; 66.245,24.108 72.747,24.108 ; 66.245,28.63 72.747,28.63 ; 66.245,28.655 72.747,28.655 ; 66.27,24.007 72.722,24.007 ; 66.27,24.032 72.722,24.032 ; 66.27,28.68 72.722,28.68 ; 66.27,28.706 72.722,28.706 ; 66.296,23.956 72.696,23.956 ; 66.296,23.981 72.696,23.981 ; 66.296,28.731 72.722,28.731 ; 66.296,28.757 72.696,28.757 ; 66.296,28.782 72.696,28.782 ; 66.321,23.905 72.671,23.905 ; 66.321,23.931 72.671,23.931 ; 66.321,28.807 72.671,28.807 ; 66.321,28.833 72.671,28.833 ; 66.346,23.854 72.646,23.854 ; 66.346,23.88 72.646,23.88 ; 66.346,28.858 72.646,28.858 ; 66.372,23.829 72.62,23.829 ; 66.372,28.884 72.646,28.884 ; 66.372,28.909 72.62,28.909 ; 66.397,23.778 72.595,23.778 ; 66.397,23.804 72.62,23.804 ; 66.397,28.934 72.595,28.934 ; 66.397,28.96 72.595,28.96 ; 66.423,23.753 72.569,23.753 ; 66.423,28.985 72.569,28.985 ; 66.448,23.702 72.544,23.702 ; 66.448,23.727 72.569,23.727 ; 66.448,29.011 72.544,29.011 ; 66.473,23.677 72.519,23.677 ; 66.473,29.036 72.519,29.036 ; 66.473,29.061 72.519,29.061 ; 66.499,23.651 72.493,23.651 ; 66.499,29.087 72.493,29.087 ; 66.524,23.6 72.468,23.6 ; 66.524,23.626 72.493,23.626 ; 66.524,29.112 72.468,29.112 ; 66.55,23.575 72.442,23.575 ; 66.55,29.138 72.442,29.138 ; 66.575,23.55 72.417,23.55 ; 66.575,29.163 72.417,29.163 ; 66.6,23.524 72.392,23.524 ; 66.6,29.188 72.392,29.188 ; 66.626,23.499 72.366,23.499 ; 66.626,29.214 72.392,29.214 ; 66.651,23.473 72.341,23.473 ; 66.651,29.239 72.341,29.239 ; 66.677,23.448 72.315,23.448 ; 66.677,29.265 72.315,29.265 ; 66.702,23.423 72.29,23.423 ; 66.702,29.29 72.29,29.29 ; 66.727,29.315 72.265,29.315 ; 66.753,23.397 72.265,23.397 ; 66.753,29.341 72.239,29.341 ; 66.778,23.372 72.214,23.372 ; 66.804,23.346 72.188,23.346 ; 66.804,29.366 72.214,29.366 ; 66.829,29.392 72.163,29.392 ; 66.854,23.321 72.163,23.321 ; 66.854,29.417 72.138,29.417 ; 66.88,23.296 72.112,23.296 ; 66.905,29.442 72.087,29.442 ; 66.931,23.27 72.087,23.27 ; 66.931,29.468 72.061,29.468 ; 66.956,23.245 72.036,23.245 ; 66.981,29.493 72.011,29.493 ; 67.007,23.219 71.985,23.219 ; 67.032,29.519 71.96,29.519 ; 67.058,23.194 71.934,23.194 ; 67.083,29.544 71.909,29.544 ; 67.108,23.169 71.884,23.169 ; 67.134,29.569 71.858,29.569 ; 67.159,23.143 71.833,23.143 ; 67.21,29.595 71.807,29.595 ; 67.235,23.118 71.757,23.118 ; 67.261,29.62 71.731,29.62 ; 67.312,23.092 71.68,23.092 ; 67.362,29.646 71.63,29.646 ; 67.413,23.067 71.579,23.067 ; 67.464,29.671 71.528,29.671 ; 67.54,23.042 71.452,23.042 ; 67.642,29.696 71.35,29.696 ; 71.02,24.87 72.849,24.87 ; 71.02,24.896 72.849,24.896 ; 71.02,24.921 72.849,24.921 ; 71.02,24.947 72.849,24.947 ; 71.02,24.972 72.849,24.972 ; 71.02,24.997 72.849,24.997 ; 71.02,25.023 72.849,25.023 ; 71.02,25.048 72.849,25.048 ; 71.02,25.074 72.849,25.074 ; 71.02,25.099 72.849,25.099 ; 71.02,25.124 72.849,25.124 ; 71.02,25.15 72.849,25.15 ; 71.02,25.175 72.849,25.175 ; 71.02,25.201 72.849,25.201 ; 71.02,25.226 72.849,25.226 ; 71.02,25.251 72.849,25.251 ; 71.02,25.277 72.849,25.277 ; 71.02,25.302 72.849,25.302 ; 71.02,25.328 72.849,25.328 ; 71.02,25.353 72.849,25.353 ; 71.02,25.378 72.849,25.378 ; 71.02,25.404 72.849,25.404 ; 71.02,25.429 72.849,25.429 ; 71.02,25.455 72.849,25.455 ; 71.02,25.48 72.849,25.48 ; 71.02,25.505 72.849,25.505 ; 71.02,25.531 72.849,25.531 ; 71.02,25.556 72.849,25.556 ; 71.02,25.582 72.849,25.582 ; 71.02,25.607 72.849,25.607 ; 71.02,25.632 72.849,25.632 ; 71.02,25.658 72.849,25.658 ; 71.02,25.683 72.849,25.683 ; 71.02,25.709 72.849,25.709 ; 71.02,25.734 72.849,25.734 ; 71.02,25.759 72.849,25.759 ; 71.02,25.785 72.849,25.785 ; 71.02,25.81 72.849,25.81 ; 71.02,25.836 72.849,25.836 ; 71.02,25.861 72.849,25.861 ; 71.02,25.886 72.849,25.886 ; 71.02,25.912 72.849,25.912 ; 71.02,25.937 72.849,25.937 ; 71.02,25.963 72.849,25.963 ; 71.02,25.988 72.849,25.988 ; 71.02,26.013 72.849,26.013 ; 71.02,26.039 72.849,26.039 ; 71.02,26.064 72.849,26.064 ; 71.02,26.09 72.849,26.09 ; 71.02,26.115 72.849,26.115 ; 71.02,26.14 72.849,26.14 ; 71.02,26.166 72.849,26.166 ; 71.02,26.191 72.849,26.191 ; 71.02,26.217 72.849,26.217 ; 71.02,26.242 72.849,26.242 ; 71.02,26.267 72.849,26.267 ; 71.02,26.293 72.849,26.293 ; 71.02,26.318 72.849,26.318 ; 71.02,26.344 72.849,26.344 ; 71.02,26.369 72.849,26.369 ; 71.02,26.394 72.849,26.394 ; 71.02,26.42 72.849,26.42 ; 71.02,26.445 72.849,26.445 ; 71.02,26.471 72.849,26.471 ; 71.02,26.496 72.849,26.496 ; 71.02,26.521 72.849,26.521 ; 71.02,26.547 72.849,26.547 ; 71.02,26.572 72.849,26.572 ; 71.02,26.598 72.849,26.598 ; 71.02,26.623 72.849,26.623 ; 71.02,26.648 72.849,26.648 ; 71.02,26.674 72.849,26.674 ; 71.02,26.699 72.849,26.699 ; 71.02,26.725 72.849,26.725 ; 71.02,26.75 72.849,26.75 ; 71.02,26.775 72.849,26.775 ; 71.02,26.801 72.849,26.801 ; 71.02,26.826 72.849,26.826 ; 71.02,26.852 72.849,26.852 ; 71.02,26.877 72.849,26.877 ; 71.02,26.902 72.849,26.902 ; 71.02,26.928 72.849,26.928 ; 71.02,26.953 72.849,26.953 ; 71.02,26.979 72.849,26.979 ; 71.02,27.004 72.849,27.004 ; 71.02,27.029 72.849,27.029 ; 71.02,27.055 72.849,27.055 ; 71.02,27.08 72.849,27.08 ; 71.02,27.106 72.849,27.106 ; 71.02,27.131 72.849,27.131 ; 71.02,27.156 72.849,27.156 ; 71.02,27.182 72.849,27.182 ; 71.02,27.207 72.849,27.207 ; 71.02,27.233 72.849,27.233 ; 71.02,27.258 72.849,27.258 ; 71.02,27.283 72.849,27.283 ; 71.02,27.309 72.849,27.309 ; 71.02,27.334 72.849,27.334 ; 71.02,27.36 72.849,27.36 ; 71.02,27.385 72.849,27.385 ; 71.02,27.41 72.849,27.41 ; 71.02,27.436 72.849,27.436 ; 71.02,27.461 72.849,27.461 ; 71.02,27.487 72.849,27.487 ; 71.02,27.512 72.849,27.512 ; 71.02,27.537 72.849,27.537 ; 71.02,27.563 72.849,27.563 ; 71.02,27.588 72.849,27.588 ; 71.02,27.614 72.849,27.614 ; 71.02,27.639 72.849,27.639 ; 71.02,27.664 72.849,27.664 ; 71.02,27.69 72.849,27.69 ; 71.02,27.715 72.849,27.715 ; 71.02,27.741 72.849,27.741 ; 71.02,27.766 72.849,27.766 ; 71.02,27.791 72.849,27.791 ; 71.02,27.817 72.849,27.817 ; 71.02,27.842 72.849,27.842 ; 71.02,27.868 72.849,27.868 ; 74.347,23.296 76.151,23.296 ; 74.347,23.321 76.176,23.321 ; 74.347,23.346 76.176,23.346 ; 74.347,23.372 76.176,23.372 ; 74.347,23.397 76.176,23.397 ; 74.347,23.423 76.176,23.423 ; 74.347,23.448 76.176,23.448 ; 74.347,23.473 76.176,23.473 ; 74.347,23.499 76.176,23.499 ; 74.347,23.524 76.176,23.524 ; 74.347,23.55 76.176,23.55 ; 74.347,23.575 76.176,23.575 ; 74.347,23.6 76.176,23.6 ; 74.347,23.626 76.176,23.626 ; 74.347,23.651 76.176,23.651 ; 74.347,23.677 76.176,23.677 ; 74.347,23.702 76.176,23.702 ; 74.347,23.727 76.176,23.727 ; 74.347,23.753 76.176,23.753 ; 74.347,23.778 76.176,23.778 ; 74.347,23.804 76.176,23.804 ; 74.347,23.829 76.176,23.829 ; 74.347,23.854 76.176,23.854 ; 74.347,23.88 76.176,23.88 ; 74.347,23.905 76.176,23.905 ; 74.347,23.931 76.176,23.931 ; 74.347,23.956 76.176,23.956 ; 74.347,23.981 76.176,23.981 ; 74.347,24.007 76.176,24.007 ; 74.347,24.032 76.176,24.032 ; 74.347,24.058 76.176,24.058 ; 74.347,24.083 76.176,24.083 ; 74.347,24.108 76.176,24.108 ; 74.347,24.134 76.176,24.134 ; 74.347,24.159 76.176,24.159 ; 74.347,24.185 76.176,24.185 ; 74.347,24.21 76.176,24.21 ; 74.347,24.235 76.176,24.235 ; 74.347,24.261 76.176,24.261 ; 74.347,24.286 76.176,24.286 ; 74.347,24.312 76.176,24.312 ; 74.347,24.337 76.176,24.337 ; 74.347,24.362 76.176,24.362 ; 74.347,24.388 76.176,24.388 ; 74.347,24.413 76.176,24.413 ; 74.347,24.439 76.176,24.439 ; 74.347,24.464 76.176,24.464 ; 74.347,24.489 76.176,24.489 ; 74.347,24.515 76.176,24.515 ; 74.347,24.54 76.176,24.54 ; 74.347,24.566 76.176,24.566 ; 74.347,24.591 76.176,24.591 ; 74.347,24.616 76.176,24.616 ; 74.347,24.642 76.176,24.642 ; 74.347,24.667 76.176,24.667 ; 74.347,24.693 76.176,24.693 ; 74.347,24.718 76.176,24.718 ; 74.347,24.743 76.176,24.743 ; 74.347,24.769 76.176,24.769 ; 74.347,24.794 76.176,24.794 ; 74.347,24.82 76.176,24.82 ; 74.347,24.845 76.176,24.845 ; 74.347,24.87 76.176,24.87 ; 74.347,24.896 76.176,24.896 ; 74.347,24.921 76.176,24.921 ; 74.347,24.947 76.176,24.947 ; 74.347,24.972 76.176,24.972 ; 74.347,24.997 76.176,24.997 ; 74.347,25.023 76.176,25.023 ; 74.347,25.048 76.176,25.048 ; 74.347,25.074 76.176,25.074 ; 74.347,25.099 76.176,25.099 ; 74.347,25.124 76.176,25.124 ; 74.347,25.15 76.176,25.15 ; 74.347,25.175 76.176,25.175 ; 74.347,25.201 76.176,25.201 ; 74.347,25.226 76.176,25.226 ; 74.347,25.251 76.176,25.251 ; 74.347,25.277 76.176,25.277 ; 74.347,25.302 76.176,25.302 ; 74.347,25.328 76.176,25.328 ; 74.347,25.353 76.176,25.353 ; 74.347,25.378 76.176,25.378 ; 74.347,25.404 76.176,25.404 ; 74.347,25.429 76.176,25.429 ; 74.347,25.455 76.176,25.455 ; 74.347,25.48 76.176,25.48 ; 74.347,25.505 76.176,25.505 ; 74.347,25.531 76.176,25.531 ; 74.347,25.556 76.176,25.556 ; 74.347,25.582 76.176,25.582 ; 74.347,25.607 76.176,25.607 ; 74.347,25.632 76.176,25.632 ; 74.347,25.658 76.176,25.658 ; 74.347,25.683 76.176,25.683 ; 74.347,25.709 76.176,25.709 ; 74.347,25.734 76.176,25.734 ; 74.347,25.759 76.176,25.759 ; 74.347,25.785 76.176,25.785 ; 74.347,25.81 76.176,25.81 ; 74.347,25.836 76.176,25.836 ; 74.347,25.861 76.176,25.861 ; 74.347,25.886 76.176,25.886 ; 74.347,25.912 76.176,25.912 ; 74.347,25.937 76.176,25.937 ; 74.347,25.963 76.176,25.963 ; 74.347,25.988 76.176,25.988 ; 74.347,26.013 76.176,26.013 ; 74.347,26.039 76.176,26.039 ; 74.347,26.064 76.176,26.064 ; 74.347,26.09 76.176,26.09 ; 74.347,26.115 76.176,26.115 ; 74.347,26.14 76.176,26.14 ; 74.347,26.166 76.176,26.166 ; 74.347,26.191 76.176,26.191 ; 74.347,26.217 76.176,26.217 ; 74.347,26.242 76.176,26.242 ; 74.347,26.267 76.176,26.267 ; 74.347,26.293 76.176,26.293 ; 74.347,26.318 76.176,26.318 ; 74.347,26.344 76.176,26.344 ; 74.347,26.369 76.176,26.369 ; 74.347,26.394 76.176,26.394 ; 74.347,26.42 76.176,26.42 ; 74.347,26.445 76.176,26.445 ; 74.347,26.471 76.176,26.471 ; 74.347,26.496 76.176,26.496 ; 74.347,26.521 76.176,26.521 ; 74.347,26.547 76.176,26.547 ; 74.347,26.572 76.176,26.572 ; 74.347,26.598 76.176,26.598 ; 74.347,26.623 76.176,26.623 ; 74.347,26.648 76.176,26.648 ; 74.347,26.674 76.176,26.674 ; 74.347,26.699 76.176,26.699 ; 74.347,26.725 76.176,26.725 ; 74.347,26.75 76.176,26.75 ; 74.347,26.775 76.176,26.775 ; 74.347,26.801 76.176,26.801 ; 74.347,26.826 76.176,26.826 ; 74.347,26.852 76.176,26.852 ; 74.347,26.877 76.176,26.877 ; 74.347,26.902 76.176,26.902 ; 74.347,26.928 76.176,26.928 ; 74.347,26.953 76.176,26.953 ; 74.347,26.979 76.176,26.979 ; 74.347,27.004 76.176,27.004 ; 74.347,27.029 76.176,27.029 ; 74.347,27.055 76.176,27.055 ; 74.347,27.08 76.176,27.08 ; 74.347,27.106 76.176,27.106 ; 74.347,27.131 76.176,27.131 ; 74.347,27.156 77.116,27.156 ; 74.347,27.182 77.167,27.182 ; 74.347,27.207 77.218,27.207 ; 74.347,27.233 77.243,27.233 ; 74.347,27.258 77.268,27.258 ; 74.347,27.283 77.294,27.283 ; 74.347,27.309 77.319,27.309 ; 74.347,27.334 77.345,27.334 ; 74.347,27.36 77.345,27.36 ; 74.347,27.385 77.345,27.385 ; 74.347,27.41 77.37,27.41 ; 74.347,27.436 77.37,27.436 ; 74.347,27.461 77.37,27.461 ; 74.347,27.487 77.37,27.487 ; 74.347,27.512 77.37,27.512 ; 74.347,27.537 77.37,27.537 ; 74.347,27.563 77.37,27.563 ; 74.347,27.588 77.37,27.588 ; 74.347,27.614 77.37,27.614 ; 74.347,27.639 77.37,27.639 ; 74.347,27.664 77.37,27.664 ; 74.347,27.69 77.37,27.69 ; 74.347,27.715 77.37,27.715 ; 74.347,27.741 77.37,27.741 ; 74.347,27.766 77.37,27.766 ; 74.347,27.791 77.37,27.791 ; 74.347,27.817 77.37,27.817 ; 74.347,27.842 77.37,27.842 ; 74.347,27.868 77.37,27.868 ; 74.347,27.893 77.37,27.893 ; 74.347,27.918 77.37,27.918 ; 74.347,27.944 77.37,27.944 ; 74.347,27.969 77.37,27.969 ; 74.347,27.995 77.37,27.995 ; 74.347,28.02 77.37,28.02 ; 74.347,28.045 77.37,28.045 ; 74.347,28.071 77.37,28.071 ; 74.347,28.096 77.37,28.096 ; 74.347,28.122 77.37,28.122 ; 74.347,28.147 77.37,28.147 ; 74.347,28.172 77.37,28.172 ; 74.347,28.198 77.37,28.198 ; 74.347,28.223 77.37,28.223 ; 74.347,28.249 77.37,28.249 ; 74.347,28.274 77.37,28.274 ; 74.347,28.299 77.37,28.299 ; 74.347,28.325 77.37,28.325 ; 74.347,28.35 77.37,28.35 ; 74.347,28.376 77.37,28.376 ; 74.347,28.401 77.37,28.401 ; 74.347,28.426 77.37,28.426 ; 74.347,28.452 77.37,28.452 ; 74.347,28.477 77.37,28.477 ; 74.347,28.503 77.37,28.503 ; 74.347,28.528 77.37,28.528 ; 74.347,28.553 77.37,28.553 ; 74.347,28.579 77.37,28.579 ; 74.347,28.604 77.37,28.604 ; 74.347,28.63 77.37,28.63 ; 74.347,28.655 77.37,28.655 ; 74.347,28.68 77.37,28.68 ; 74.347,28.706 77.37,28.706 ; 74.347,28.731 77.345,28.731 ; 74.347,28.757 77.345,28.757 ; 74.347,28.782 77.345,28.782 ; 74.347,28.807 77.319,28.807 ; 74.347,28.833 77.294,28.833 ; 74.347,28.858 77.268,28.858 ; 74.347,28.884 77.243,28.884 ; 74.347,28.909 77.218,28.909 ; 74.347,28.934 77.167,28.934 ; 74.347,28.96 77.091,28.96 ; 74.347,28.985 76.176,28.985 ; 74.347,29.011 76.176,29.011 ; 74.347,29.036 76.176,29.036 ; 74.347,29.061 76.176,29.061 ; 74.347,29.087 76.176,29.087 ; 74.347,29.112 76.176,29.112 ; 74.347,29.138 76.176,29.138 ; 74.347,29.163 76.176,29.163 ; 74.347,29.188 76.176,29.188 ; 74.347,29.214 76.176,29.214 ; 74.347,29.239 76.176,29.239 ; 74.347,29.265 76.176,29.265 ; 74.347,29.29 76.176,29.29 ; 74.347,29.315 76.176,29.315 ; 74.347,29.341 76.176,29.341 ; 74.347,29.366 76.176,29.366 ; 74.347,29.392 76.176,29.392 ; 74.347,29.417 76.176,29.417 ; 74.347,29.442 76.176,29.442 ; 74.347,29.468 76.176,29.468 ; 74.347,29.493 76.176,29.493 ; 74.347,29.519 76.176,29.519 ; 74.347,29.544 76.176,29.544 ; 74.347,29.569 76.176,29.569 ; 74.347,29.595 76.176,29.595 ; 74.347,29.62 76.176,29.62 ; 74.347,29.646 76.176,29.646 ; 74.347,29.671 76.176,29.671 ; 74.347,29.696 76.176,29.696 ; 74.347,29.722 76.176,29.722 ; 74.347,29.747 76.176,29.747 ; 74.347,29.773 76.176,29.773 ; 74.347,29.798 76.176,29.798 ; 74.347,29.823 76.176,29.823 ; 74.347,29.849 76.176,29.849 ; 74.347,29.874 76.176,29.874 ; 74.347,29.9 76.176,29.9 ; 74.347,29.925 76.176,29.925 ; 74.347,29.95 76.176,29.95 ; 74.347,29.976 76.176,29.976 ; 74.347,30.001 76.176,30.001 ; 74.347,30.027 76.176,30.027 ; 74.347,30.052 76.176,30.052 ; 74.347,30.077 76.176,30.077 ; 74.347,30.103 76.176,30.103 ; 74.347,30.128 76.176,30.128 ; 74.347,30.154 76.176,30.154 ; 74.347,30.179 76.176,30.179 ; 74.347,30.204 76.176,30.204 ; 74.347,30.23 76.176,30.23 ; 74.347,30.255 77.827,30.255 ; 74.347,30.281 77.903,30.281 ; 74.347,30.306 77.929,30.306 ; 74.347,30.331 77.954,30.331 ; 74.347,30.357 77.98,30.357 ; 74.347,30.382 78.005,30.382 ; 74.347,30.408 78.03,30.408 ; 74.347,30.433 78.056,30.433 ; 74.347,30.458 78.056,30.458 ; 74.347,30.484 78.056,30.484 ; 74.347,30.509 78.081,30.509 ; 74.347,30.535 78.081,30.535 ; 74.347,30.56 78.081,30.56 ; 74.347,30.585 78.081,30.585 ; 74.347,30.611 78.081,30.611 ; 74.347,30.636 78.081,30.636 ; 74.373,23.219 76.125,23.219 ; 74.373,23.245 76.151,23.245 ; 74.373,23.27 76.151,23.27 ; 74.373,30.662 78.081,30.662 ; 74.373,30.687 78.081,30.687 ; 74.373,30.712 78.081,30.712 ; 74.373,30.738 78.081,30.738 ; 74.373,30.763 78.081,30.763 ; 74.398,23.169 76.1,23.169 ; 74.398,23.194 76.125,23.194 ; 74.398,30.789 78.081,30.789 ; 74.398,30.814 78.081,30.814 ; 74.398,30.839 78.081,30.839 ; 74.398,30.865 78.081,30.865 ; 74.424,23.143 76.075,23.143 ; 74.424,30.89 78.081,30.89 ; 74.424,30.916 78.081,30.916 ; 74.424,30.941 78.081,30.941 ; 74.449,23.118 76.075,23.118 ; 74.449,30.966 78.081,30.966 ; 74.449,30.992 78.081,30.992